# Altium PCB Booster_USER_IFC_ENC424J600.PcbDoc (part 1 of 2)
Units mm, origin at the board's own origin, x right, y up, seen from the top; angles counter-clockwise.
Board outline 78 x 45 mm, 2 copper layers (Top Layer, Bottom Layer), stack 1.571 mm thick; 90 components, 92 nets, 349 pads, 172 vias.
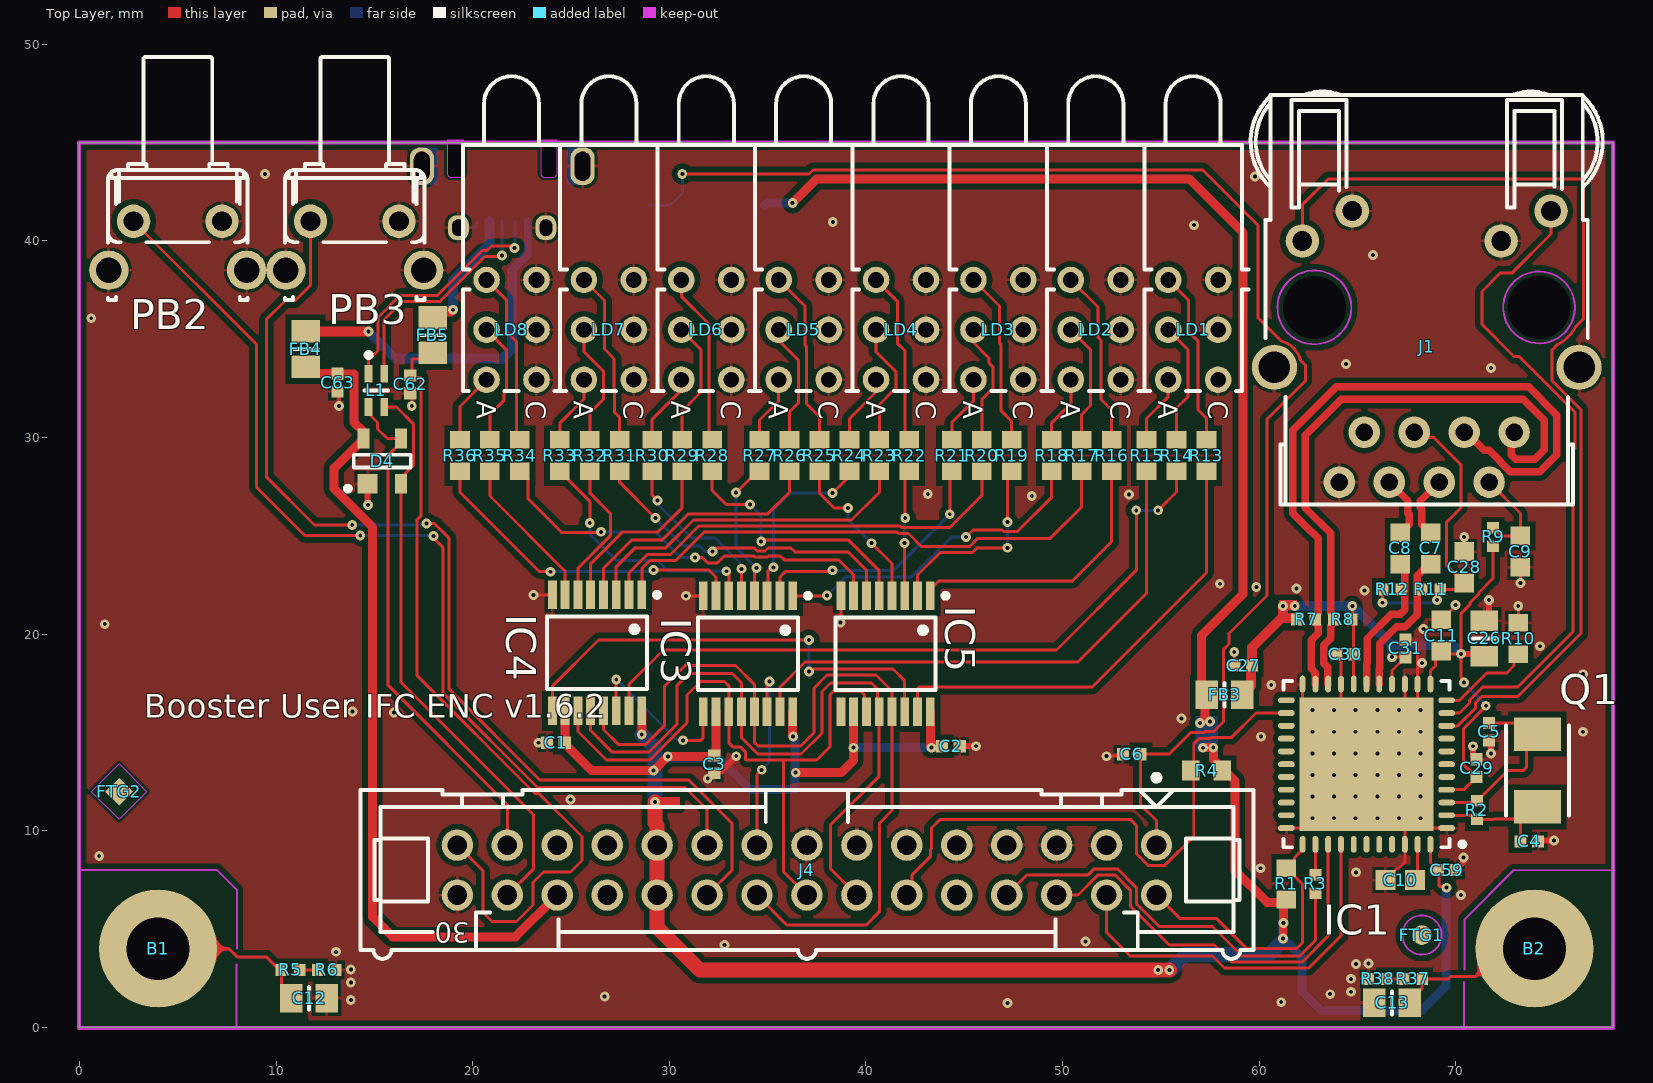
[diagram p0: Top Layer view]
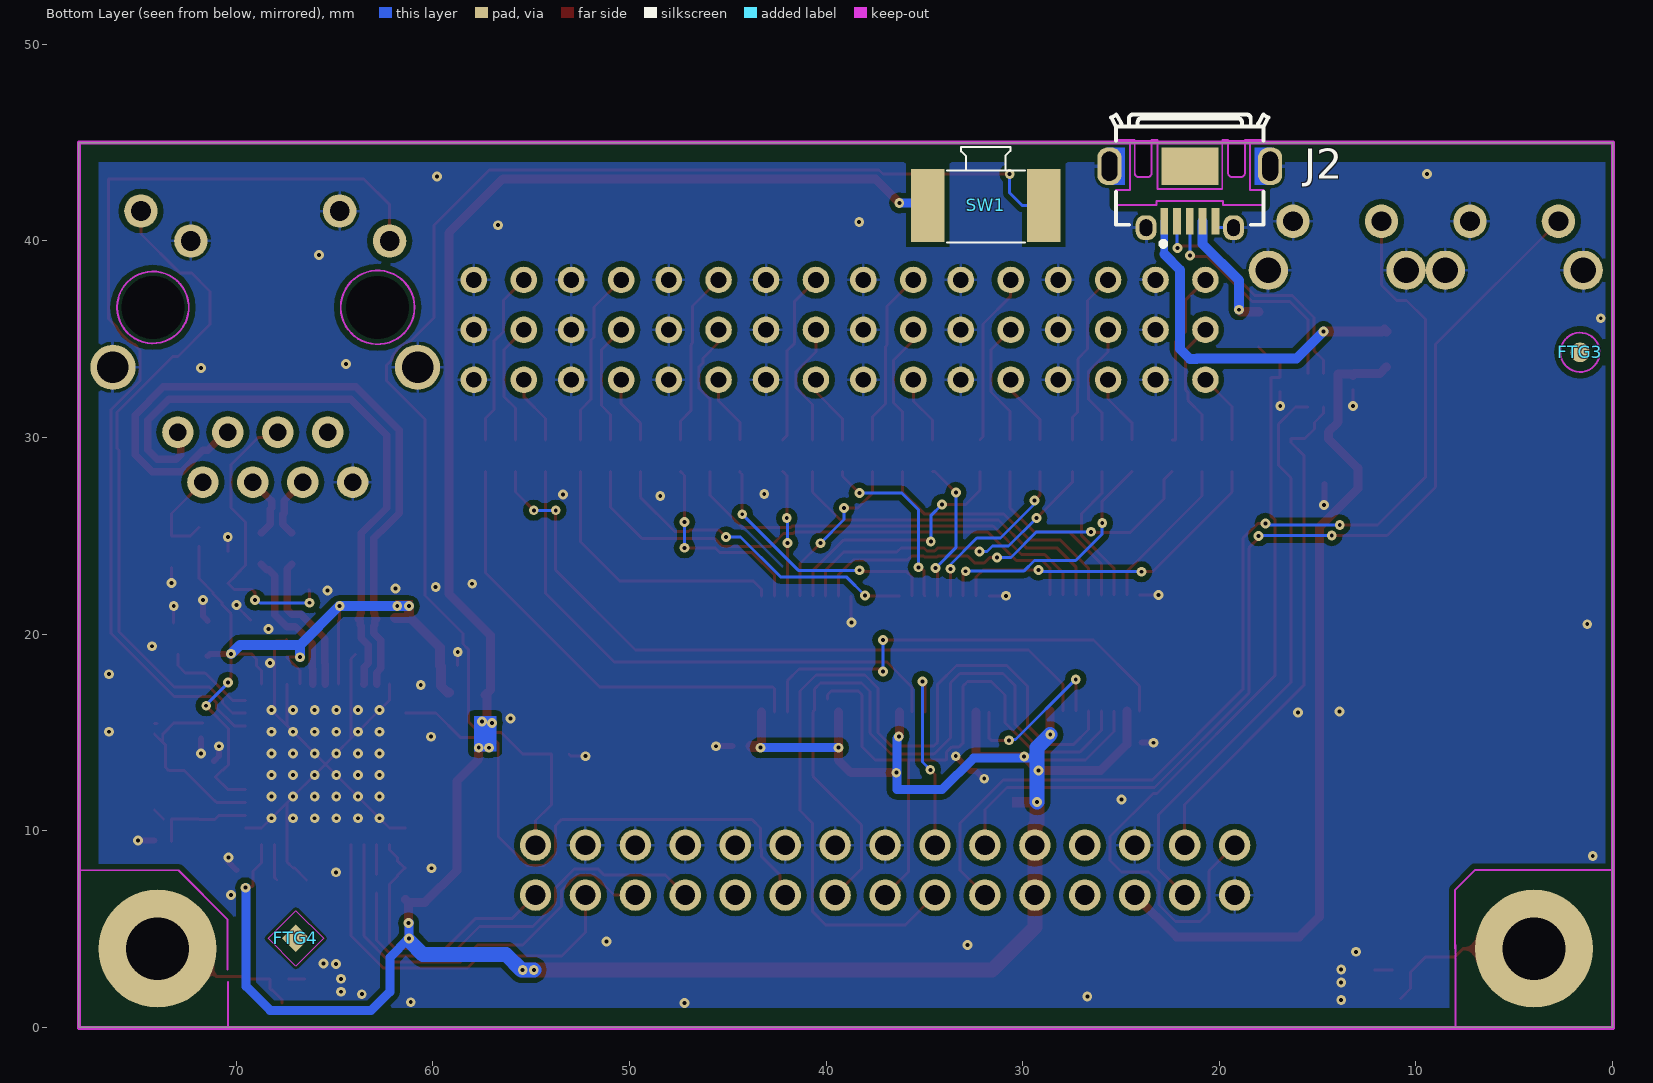
[diagram p1: Bottom Layer view, seen from below]
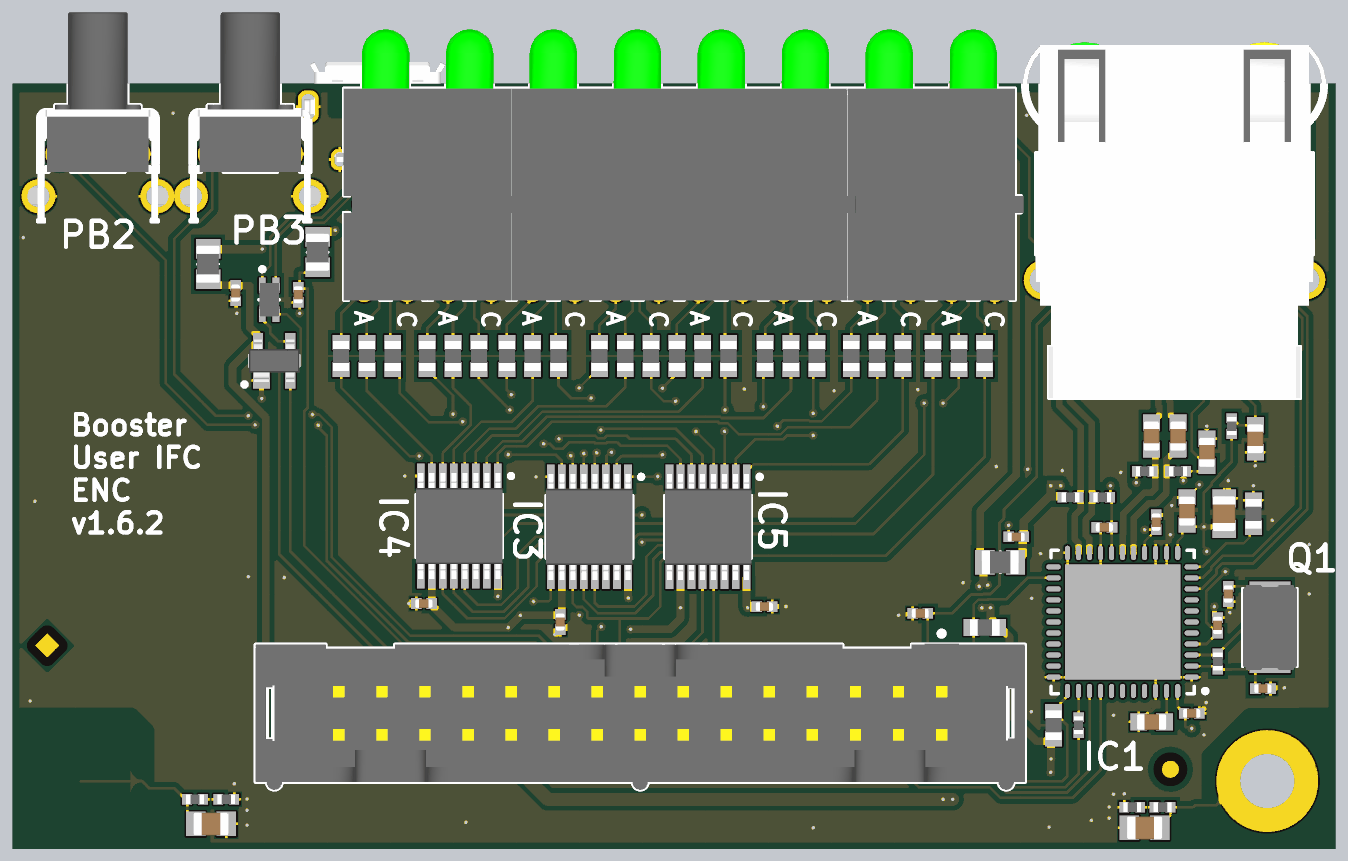
[diagram p2: 3D render of the assembled board from above, using the file's embedded part models]

## Layer stack, top to bottom
Top Solder: solder mask 0.0102, Solder Resist, Dk 3.5
Top Layer: signal copper 0.0356
Dielectric 1: dielectric 1.5, FR-4, Dk 4.8
Bottom Layer: signal copper 0.0356
Bottom Solder: solder mask 0.0102, Solder Resist, Dk 3.5

## Board outline
0,0 78,0 78,45 0,45

## Design rules (kind name [scope] priority, off if disabled: settings)
Clearance [All] p1: gap=0.152 ignorepadtopadclearanceinfootprint=FALSE except(0: Arc-Hole SMDPad-Hole THPad-Hole Via-Hole Fill-Hole Poly-Hole Region-Hole Text-Hole; 0.279: Arc-Poly Track-Poly SMDPad-Poly THPad-Poly Via-Poly Fill-Poly Poly-Poly)
DiffPairsRouting [All] p1: maxlimit=0.254 minlimit=0.254 mostfreqgap=0.254 toplayer_minwidth=0.254 toplayer_maxwidth=0.381 toplayer_prefwidth=0.381 bottomlayer_minwidth=0.254 bottomlayer_maxwidth=0.381 bottomlayer_prefwidth=0.381 maxuncoupledlength=12.7
HoleSize [All] p1: absolutevalues=TRUE maxlimit=5.08 minlimit=0.2 maxpercent=80.000 minpercent=20.000
MinimumSolderMaskSliver [All] p1: minsoldermaskwidth=0.025
PolygonConnect PolygonConnect_pad [IsPad] p1: connectstyle=Relief reliefconductorwidth=0.152 reliefentries=4 polygonreliefangle="90 Angle" airgapwidth=0.152
PolygonConnect [All] p2: connectstyle=Direct reliefconductorwidth=0.254 reliefentries=4 polygonreliefangle="45 Angle" airgapwidth=0.254
RoomDefinition Booster_USER_IFC_ENC424J600 [InComponentClass('Booster_USER_IFC_ENC424J600')] p1 off: confinementstyle=ConfineIn formatcopy=TRUE lockcomponents=FALSE outline 84.205,47.828 1.833,47.828 1.833,-0.432 84.205,-0.432
RoomDefinition U_LEDs [InComponentClass('U_LEDs')] p2 off: confinementstyle=ConfineIn formatcopy=TRUE lockcomponents=FALSE outline 81.557,48.796 10.818,48.796 10.818,-0.353 81.557,-0.353
RoomDefinition U_ETH_IFC [InComponentClass('U_ETH_IFC')] p3 off: confinementstyle=ConfineIn formatcopy=TRUE lockcomponents=FALSE outline 83.269,45.748 59,45.748 59,-0.861 83.269,-0.861
RoutingVias [All] p1: holewidth=0.711 width=0.5 viastyle="Through Hole" minholewidth=0.3 minwidth=0.5 maxholewidth=0.3 maxwidth=1.27 useviatemplates=TRUE viatemplateguid#1={FB9DD917-28AC-471E-A59E-34B30C6D48CE} viatemplatename#1=v50h20m0mx0
SilkToSilkClearance [All] p1: silktosilkclearance=0
SilkToSolderMaskClearance [IsPad] p1: minsilkscreentomaskgap=0 clearancetoexposedcopper=TRUE
SolderMaskExpansion [All] p1: expansion=0.102 istentingtop=FALSE
Width [All] p1: maxlimit=2.54 minlimit=0.152 preferedwidth=0.152
25 further rules are at their usual default settings.

## Classes and differential pairs
component class Booster_USER_IFC_ENC424J600: B1 B2 C6 C12 C13 C62 C63 D4 FB4 FB5 FTG1 FTG2 FTG3 FTG4 J2 J4 L1 PB2 PB3 R5 R6 R37 R38 SW1
component class U_ETH_IFC: C4 C5 C7 C8 C9 C10 C11 C26 C27 C28 C29 C30 C31 C59 FB3 IC1 J1 Q1 R1 R2 R3 R4 R7 R8 R9 R10 R11 R12
component class U_LEDs: C1 C2 C3 IC3 IC4 IC5 LD1 LD2 LD3 LD4 LD5 LD6 LD7 LD8 R13 R14 R15 R16 R17 R18 R19 R20 R21 R22 R23 R24 R25 R26 R27 R28 R29 R30 R31 R32 R33 R34 R35 R36
differential pair RJ45_TX: +RJ45_TX_P -RJ45_TX_N
differential pair RJ45_RX: +RJ45_RX_P -RJ45_RX_N
differential pair RJ45_RX_C: +RJ45_RX_C_P -RJ45_RX_C_N

## Components (designator, comment, footprint, x,y, rotation, side; value= is the part's Value field where it differs from the comment)
B1 "Plated Hole" MTG320_550#1 88.417,-1.981 r90 top
B2 "Plated Hole" MTG320_550#2 82.136,2.988 r90 top
C1 "100nF" CAPC1005X55N 24.235,14.478 r180 top
C2 "100nF" CAPC1005X55N 44.327,14.3 r0 top
C3 "100nF" CAPC1005X55N 32.287,13.386 r270 top
C4 "18pF" CAPC1005X55N 73.74,9.459 r180 top
C5 "18pF" CAPC1005X55N 71.7,15.037 r90 top
C6 "100nF" CAPC1005X55N 53.522,13.894 r0 top
C7 "6.8nF" CAPC1608X87N 68.736,24.358 r90 top
C8 "6.8nF" CAPC1608X87N 67.175,24.358 r90 top
C9 "10nF" CAPC1608X87N 73.29,24.2 r90 top
C10 "10uF" CAPC1608X80N 67.175,7.493 r180 top
C11 "6.8nF" CAPC1608X87N 69.263,19.931 r90 top
C12 "100pF" CAPC2012X88N 11.677,1.473 r0 top
C13 "100pF" CAPC2012X88N 66.763,1.24 r180 top
C26 "10uF" CAPC2012X135N 71.454,19.781 r90 top
C27 "100nF" CAPC1005X55N 59.186,18.405 r180 top
C28 "10nF" CAPC1608X87N 70.43,23.4 r270 top
C29 "100nF" CAPC1005X55N 71.064,13.187 r90 top
C30 "100nF" CAPC1005X55N 64.386,18.974 r180 top
C31 "100nF" CAPC1005X55N 67.441,19.279 r90 top
C59 "100nF" CAPC1005X55N 69.538,8 r0 top
C62 "100nF" CAPC1005X55N 16.824,32.7 r90 top
C63 "100nF" CAPC1005X55N 13.124,32.8 r90 top
D4 "PRTR5V0U2X" SOT190P230X110-4N 15.4,28.8 r90 top
FB3 "220R@100MHz" INDC2012X105N 58.242,16.912 r0 top
FB4 "220R@100MHz" INDC2012X105N 11.5,34.5 r90 top
FB5 "220R@100MHz" INDC2012X105N 17.962,35.204 r90 top
FTG1 "Use only in PCB" FIDUCIAL_TOP_C100-200 68.282,4.696 r90 top
FTG2 "Use only in PCB" FIDUCIAL_TOP_S100-200 2.01,11.989 r90 top
FTG3 "Use only in PCB" FIDUCIAL_TOP_C100-200 1.65,34.335 r90 bottom
FTG4 "Use only in PCB" FIDUCIAL_TOP_S100-200 66.971,4.529 r90 bottom
IC1 "ENC424J600-I/ML" QFN-ML44_M 65.463,13.387 r180 top
IC3 "SN74LV595APWT" SOP65P640X120-16N 34,19 r270 top
IC4 "SN74LV595APWT" SOP65P640X120-16N 26.325,19.05 r270 top
IC5 "SN74LV595APWT" SOP65P640X120-16N 41,19 r270 top
J1 "RJ45" TYCO_5-6605308-1 68.525,29 r180 top
J2 "Micro-USB AB 2.0" HIROSE_ZX62RD-AB-5P8 21.5,41 r0 bottom locked
J4 "" 3M_N2530-6002RB 37,8 r180 top locked
L1 "90R@100MHz" IND_MURATA_DLW21S 15.1,32.4 r270 top
LD1 "Red/Yellow/Green" LED_MENTOR_1882.2781 56.645,35.478 r270 top locked
LD2 "Red/Yellow/Green" LED_MENTOR_1882.2781 51.692,35.478 r270 top locked
LD3 "Red/Yellow/Green" LED_MENTOR_1882.2781 46.739,35.478 r270 top locked
LD4 "Red/Yellow/Green" LED_MENTOR_1882.2781 41.786,35.478 r270 top locked
LD5 "Red/Yellow/Green" LED_MENTOR_1882.2781 36.833,35.478 r270 top locked
LD6 "Red/Yellow/Green" LED_MENTOR_1882.2781 31.88,35.478 r270 top locked
LD7 "Red/Yellow/Green" LED_MENTOR_1882.2781 26.927,35.478 r270 top locked
LD8 "Red/Yellow/Green" LED_MENTOR_1882.2781 21.974,35.478 r270 top locked
PB2 "Push Button" PB_TYCO_1-1825027-1 5,41 r270 top
PB3 "Push Button" PB_TYCO_1-1825027-1 14,41 r270 top
Q1 "25MHz" XTAL_TXC_AA 74.154,13.063 r90 top
R1 "12k4" RESC1608X55N 61.388,7.3 r270 top
R2 "1M5" RESC1005X40N 71.082,11.052 r90 top
R3 "49R9" RESC1005X40N 62.863,7.3 r90 top
R4 "12k4" RESC1608X55N 57.325,13.063 r0 top
R5 "1M5" RESC1005X40N 10.732,2.921 r0 top
R6 "1M5" RESC1005X40N 12.577,2.921 r0 top
R7 "49R9" RESC1005X40N 62.385,20.752 r180 top
R8 "49R9" RESC1005X40N 64.256,20.752 r0 top
R9 "10" RESC1005X40N 71.898,24.943 r90 top
R10 "12k4" RESC1608X55N 73.181,19.774 r90 top
R11 "49R9" RESC1005X40N 68.736,22.275 r180 top
R12 "49R9" RESC1005X40N 66.763,22.275 r0 top
R13 "330" RESC1608X55N 57.323,29.082 r90 top
R14 "330" RESC1608X55N 55.799,29.082 r90 top
R15 "330" RESC1608X55N 54.275,29.082 r90 top
R16 "330" RESC1608X55N 52.497,29.082 r90 top
R17 "330" RESC1608X55N 50.973,29.082 r90 top
R18 "330" RESC1608X55N 49.449,29.082 r90 top
R19 "330" RESC1608X55N 47.417,29.082 r90 top
R20 "330" RESC1608X55N 45.893,29.082 r90 top
R21 "330" RESC1608X55N 44.369,29.082 r90 top
R22 "330" RESC1608X55N 42.21,29.082 r90 top
R23 "330" RESC1608X55N 40.686,29.082 r90 top
R24 "330" RESC1608X55N 39.162,29.082 r90 top
R25 "330" RESC1608X55N 37.638,29.082 r90 top
R26 "330" RESC1608X55N 36.114,29.082 r90 top
R27 "330" RESC1608X55N 34.59,29.082 r90 top
R28 "330" RESC1608X55N 32.177,29.082 r90 top
R29 "330" RESC1608X55N 30.653,29.082 r90 top
R30 "330" RESC1608X55N 29.129,29.082 r90 top
R31 "330" RESC1608X55N 27.478,29.082 r90 top
R32 "330" RESC1608X55N 25.954,29.082 r90 top
R33 "330" RESC1608X55N 24.43,29.082 r90 top
R34 "330" RESC1608X55N 22.398,29.082 r90 top
R35 "330" RESC1608X55N 20.874,29.082 r90 top
R36 "330" RESC1608X55N 19.35,29.082 r90 top
R37 "1M5" RESC1005X40N 67.822,2.464 r180 top
R38 "1M5" RESC1005X40N 66.031,2.464 r180 top
SW1 "KSS241G LFS" "KSS241G LFS" 31.881,41.808 r0 bottom locked

## Footprints (in the part's own frame and the unit in brackets; to place one, negate y for a bottom-side part, rotate by r counter-clockwise, add the part's x,y. Pads: shape width x height; smd on the part's side, far side on the other; paste and mask are expansions set on the pad)
3M_N2530-6002RB [mm] "30 Contacts - Straight .100\" x .100\" Low Profile Four-Wall Header"
  round 1.6 hole 1: 1(-17.78,-1.27) 2(-17.78,1.27) 3(-15.24,-1.27) 4(-15.24,1.27) 5(-12.7,-1.27) 6(-12.7,1.27) 7(-10.16,-1.27) 8(-10.16,1.27) 9(-7.62,-1.27) 10(-7.62,1.27) 11(-5.08,-1.27) 12(-5.08,1.27) 13(-2.54,-1.27) 14(-2.54,1.27) 15(0,-1.27) 16(0,1.27) 17(2.54,-1.27) 18(2.54,1.27) 19(5.08,-1.27) 20(5.08,1.27) 21(7.62,-1.27) 22(7.62,1.27) 23(10.16,-1.27) 24(10.16,1.27) 25(12.7,-1.27) 26(12.7,1.27) 27(15.24,-1.27) 28(15.24,1.27) 29(17.78,-1.27) 30(17.78,1.27)
  silkscreen extent -22.71,-4.85 22.71,4.52, body extent -22.71,-4.11 22.71,4.52, height 9.91
CAPC1005X55N [mm] "Chip Capacitor, Body 1.0x0.55mm, IPC Medium Density"
  rect 0.62x0.62 smd: 1(-0.45,0) 2(0.45,0)
  body extent -0.52,-0.27 0.53,0.28, height 0.55
CAPC1608X80N [mm] "Chip Capacitor, Body 1.6x0.8mm IPC Medium Density"
  rect 1x1 smd: 1(-0.75,0) 2(0.75,0)
  body extent -0.87,-0.47 0.88,0.48, height 0.8
CAPC1608X87N [mm] "Chip Capacitor, Body 1.6x0.8mm IPC Medium Density"
  rect 0.95x1 smd: 1(-0.8,0) 2(0.8,0)
  body extent -0.87,-0.47 0.88,0.48, height 0.87
CAPC2012X88N [mm] "Chip Capacitor, Body 2.0x1.25mm, IPC Medium Density"
  rect 1.15x1.45 smd: 1(-0.9,0) 2(0.9,0)
  silkscreen extent 0,-0.58 0,0.58, body extent -1.05,-0.67 1.05,0.68, height 0.9
CAPC2012X135N [mm] "Chip Capacitor, Body 2.0x1.25mm, IPC Medium Density"
  rect 1.05x1.4 smd: 1(-0.9,0) 2(0.9,0)
  silkscreen extent 0,-0.58 0,0.58, body extent -1.05,-0.67 1.05,0.68, height 1.25
FIDUCIAL_TOP_C100-200 [mm] "Round Fiducial Target, Top Layer, 1.0mm, Top Solder 2.0mm, Keepout =2.0mm"
  round 1 smd paste-0.51 mask+0.5: FTG2(0,0)
  Top Layer keep-out circle w0.1: c0,0 r1
FIDUCIAL_TOP_S100-200 [mm] "Square Fiducial Target, Top Layer, 1.0mm, Top Solder 2.0mm, Keepout =2.0mm"
  rect 1x1 smd rot 45 paste-0.51 mask+0.5: 1(0,0)
  Top Layer keep-out region: 1.414,0 0,-1.414 -1.414,0 0,1.414
HIROSE_ZX62RD-AB-5P8 [mm] "Right Angle, SMD Micro-USB Type AB - Reverse (Top mount), Shell Through Hole"
  rect 0.4x1.35 smd: 1(1.3,0) 2(0.65,0) 3(0,0) 4(-0.65,0) 5(-1.3,0)
  rrect80% 1.225x1.9 hole 0.8 slot 1.5 at 90 deg: 6(-4.088,-2.8) 6(4.088,-2.8)
  rrect80% 1.05x1.25 hole 0.65 slot 0.85 at 90 deg: 6(-2.225,0.325) 6(2.225,0.325)
  rect 2.9x1.9 smd: PastePad(0,-2.8)
  Top Layer region: 4.2,-3.75 4.2,-1.85 3.3,-1.85 3.3,-1.85 3.3,-3.75
  Top Layer region: -4.2,-1.85 -4.2,-3.75 -3.3,-3.75 -3.3,-3.75 -3.3,-1.85
  Top Layer keep-out lines w0.1: -3.75,-0.825 -1.7,-0.825 -1.7,-1.025 1.7,-1.025 1.7,-0.825 3.75,-0.825 3.75,-1.6 3.05,-1.6 3.05,-4 3.75,-4 3.75,-4.125 2.8,-4.125 2.8,-2.45 ccw(c2.6,-2.45) 2.6,-2.25 2.15,-2.25 ccw(c2.15,-2.45) 1.95,-2.45 1.95,-4.125 1.65,-4.125 1.65,-1.65 -1.65,-1.65 -1.65,-4.125 -1.95,-4.125 -1.95,-2.45 ccw(c-2.15,-2.45) -2.15,-2.25 -2.6,-2.25 ccw(c-2.6,-2.45) -2.8,-2.45 -2.8,-4.125 -3.75,-4.125 -3.75,-4 -3.05,-4 -3.05,-1.6 -3.75,-1.6 -3.75,-0.825
  Keep-Out Layer board cut-out: -2.8,-4.125 -2.8,-2.45 -2.785,-2.373 -2.741,-2.309 -2.676,-2.265 -2.6,-2.25 -2.6,-2.25 -2.15,-2.25 -2.073,-2.265 -2.009,-2.309 -1.965,-2.373 -1.95,-2.45 -1.95,-2.45 -1.95,-4.125
  Keep-Out Layer board cut-out: 1.95,-4.125 1.95,-2.45 1.965,-2.373 2.009,-2.309 2.074,-2.265 2.15,-2.25 2.15,-2.25 2.6,-2.25 2.677,-2.265 2.741,-2.309 2.785,-2.373 2.8,-2.45 2.8,-2.45 2.8,-4.125
  silkscreen extent -4,-5.42 4,1.27, body extent -4.32,-5.42 4.33,0.47, height 2.78
IND_MURATA_DLW21S [mm] "Common Mode Choke Coil, DLW21S Series - Body 2 x 1.2mm"
  rect 0.9x0.4 smd: 1(-0.85,-0.4) 2(0.85,-0.4) 3(0.85,0.4) 4(-0.85,0.4)
  silkscreen extent -1.92,-0.6 0,0.6, body extent -1,-0.6 1,0.6, height 1.4
INDC2012X105N [mm] "Chip Inductor, EIA 0805, Metric 2012, Body 2.0x1.25mm, IPC Medium Density"
  rect 1.15x1.45 smd: 1(-0.9,0) 2(0.9,0)
  silkscreen extent 0,-0.6 0,0.6, body extent -1.1,-0.7 1.1,0.7, height 1.1
"KSS241G LFS" [mm]
  rect 1.7x3.7 smd: 1(-2.95,0) 2(2.95,0)
  silkscreen extent -2,-2.98 1.97,1.88, body extent -3.6,-2.98 3.6,1.7, height 1.65
LED_MENTOR_1882.2781 [mm] "3x LED 3mm (Red+Yellow +Green) PCB Edge Mounting MENTOR 1882.2781"
  round 1.35 hole 0.8: 1(-2.54,1.27) 2(-2.54,-1.27) 3(0,1.27) 4(0,-1.27) 5(2.54,1.27) 6(2.54,-1.27)
  silkscreen extent -12.9,-2.47 3.1,2.83, body extent -12.88,-2.47 3.12,2.98, height 12
MTG320_550#1 [mm] "Plated Through Hole: Hole Dia.=3.2mm Pad Dia.=5.5mm"
  round 6 hole 3.2: 1(5.981,84.417)
MTG320_550#2 [mm] "Plated Through Hole: Hole Dia.=3.2mm Pad Dia.=5.5mm"
  round 6 hole 3.2: 1(1.012,8.136)
PB_TYCO_1-1825027-1 [mm] "Right Angle Micro Miniature Tactile Pushbutton Switche, Round Actuator Length = 5.74mm, FSMRAJ Serie"
  round 1.7 hole 1: 1(0,-2.25) 2(0,2.25)
  round 2 hole 1.3: 3(2.49,-3.505) 4(2.49,3.505)
  silkscreen extent -8.36,-3.56 4,3.56, body extent -8.36,-4.2 4,4.2, height 7.01
QFN-ML44_M [mm] "QFN, 44-Leads, Body 8x8mm, Pitch 0.65mm, Thermal Pad 6.8x6.8mm, IPC Low Density"
  oval 0.85x0.3 smd: 1(-4.075,3.25) 2(-4.075,2.6) 3(-4.075,1.95) 4(-4.075,1.3) 5(-4.075,0.65) 6(-4.075,0) 7(-4.075,-0.65) 8(-4.075,-1.3) 9(-4.075,-1.95) 10(-4.075,-2.6) 11(-4.075,-3.25) 23(4.075,-3.25) 24(4.075,-2.6) 25(4.075,-1.95) 26(4.075,-1.3) 27(4.075,-0.65) 28(4.075,0) 29(4.075,0.65) 30(4.075,1.3) 31(4.075,1.95) 32(4.075,2.6) 33(4.075,3.25)
  oval 0.3x0.85 smd: 12(-3.25,-4.075) 13(-2.6,-4.075) 14(-1.95,-4.075) 15(-1.3,-4.075) 16(-0.65,-4.075) 17(0,-4.075) 18(0.65,-4.075) 19(1.3,-4.075) 20(1.95,-4.075) 21(2.6,-4.075) 22(3.25,-4.075) 34(3.25,4.075) 35(2.6,4.075) 36(1.95,4.075) 37(1.3,4.075) 38(0.65,4.075) 39(0,4.075) 40(-0.65,4.075) 41(-1.3,4.075) 42(-1.95,4.075) 43(-2.6,4.075) 44(-3.25,4.075)
  rect 6.8x6.8 smd: 45(0,0)
  silkscreen extent -5,-4.23 4.23,4.23, body extent -4.07,-4.07 4.08,4.08, height 1
RESC1005X40N [mm] "Chip Resistor, EIA 0402, Metric 1005, Body 1.0x0.5mm, IPC Medium Density"
  rect 0.58x0.62 smd: 1(-0.47,0) 2(0.47,0)
  body extent -0.52,-0.27 0.53,0.28, height 0.4
RESC1608X55N [mm] "Chip Resistor, EIA 0603, Metric 1608, Body 1.6x0.8mm, IPC Medium Density"
  rect 0.9x1 smd: 1(-0.8,0) 2(0.8,0)
  body extent -0.87,-0.47 0.88,0.48, height 0.55
SOP65P640X120-16N [mm] "SOP, 0.65mm pitch; 16 pin, 4.40mm W X 5.00mm L X 1.20mm H body IPC Medium Density"
  rect 1.45x0.45 smd: 1(-2.95,2.275) 2(-2.95,1.625) 3(-2.95,0.975) 4(-2.95,0.325) 5(-2.95,-0.325) 6(-2.95,-0.975) 7(-2.95,-1.625) 8(-2.95,-2.275) 9(2.95,-2.275) 10(2.95,-1.625) 11(2.95,-0.975) 12(2.95,-0.325) 13(2.95,0.325) 14(2.95,0.975) 15(2.95,1.625) 16(2.95,2.275)
  silkscreen extent -3.07,-2.55 1.85,3.17, body extent -3.12,-2.55 3.12,2.55, height 1.2
SOT190P230X110-4N [mm] "SOT143, SOT, 1.90mm Pitch; 4 Pin, 1.30mm W X 2.90mm L X 1.10mm H body, IPC Medium Density"
  rect 1x1 smd: 1(-1.15,0.75)
  rect 1x0.6 smd: 2(-1.15,-0.95) 3(1.15,-0.95) 4(1.15,0.95)
  silkscreen extent -1.52,-1.45 0.33,1.87, body extent -1.25,-1.5 1.25,1.5, height 1.1
TYCO_5-6605308-1 [mm] "1 Port, Yellow/Green LEDs, RJ45 10/100Base-T Ethernet, Mag45 Connector Module With Integrated Magnetics"
  round 1.6 hole 0.9: 1(-4.445,-1.27) 2(-3.175,1.27) 3(-1.905,-1.27) 4(-0.635,1.27) 5(0.635,-1.27) 6(1.905,1.27) 7(3.175,-1.27) 8(4.445,1.27)
  round 2.3 hole 1.6: 9(-7.747,-4.572) 10(7.747,-4.572)
  round 1.7 hole 1: D1(-6.325,-12.522) D2(-3.785,-10.998) D3(6.325,-10.998) D4(3.785,-12.522)
  round 0.5 hole 3.2 unplated mask+1.35: M1(-5.715,-7.62) M2(5.715,-7.62)
  silkscreen extent -8.95,-18.59 8.95,2.41, body extent -8.95,-18.6 8.95,2.41, height 14.97
XTAL_TXC_AA [mm] "2 Pins, 3.2x5mm, SMD Glass Sealing Crystal, AA Series"
  rect 1.7x2.4 smd: 1(-1.85,0) 2(1.85,0)
  silkscreen extent -2.3,-1.6 2.3,1.6, body extent -2.5,-1.6 2.5,1.6, height 1.2

## Part data
B1 B2: library part PLATED_HOLE3.2_PAD5.5, "Single Terminal Socket", Author="CERN DEM JMW", Component Type="Standard (No BOM)", ComponentHeight=0mm, CreateDate=01.10.2012, Family="Plated Hole", HelpURL=Undefined, LatestRevisionDate=01.10.2012, Mounted=No, PackageDescription="Plated Through Hole: Hole Dia.=3.2mm Pad Dia.=5.5mm", Part Description="Plated Through Hole: Hole Dia.=3.2mm Pad Dia.=5.5mm", Part Number=PLATED_HOLE3.2_PAD5.5, Pin Count=1, Sense=No, SMD=No, Socket=No, Status=None
C1 C2 C3 C6 C27 C29 C30 C31 C59 C62 C63: library part CC0402_100NF_16V_10%_X7R, "Non-polarised capacitor", Case=0402, Manufacturer=GENERIC, Manufacturer1 ComponentHeight=0.55mm, Manufacturer1 Example=MURATA, Manufacturer1 Part Number=GRM155R71C104KA88D, Tolerance=±10%, Voltage=16V, Author="CERN DEM JLC", Component Type=Standard, CreateDate=05.12.2013, HelpURL=\\cern.ch\dfs\Applications\Altium\Datasheets\CC0402_X7R_MURATA_GRM.pdf, LatestRevisionDate=03.12.2007, Manufacturer Part Number=CC0402_100NF_16V_10%_X7R, Mounted=Yes, Part Description="SMD Multilayer Chip Ceramic Capacitor", Part Number=CC0402_100NF_16V_10%_X7R, Pin Count=2, Sense=No, SMD=Yes, Socket=No, Status="Not Recommended", TC=X7R
C4 C5: library part CC0402_18PF_50V_5%_C0G, "Non-polarised capacitor", Case=0402, Manufacturer=GENERIC, Manufacturer1 ComponentHeight=0.55mm, Manufacturer1 Example=KEMET, Manufacturer1 Part Number=C0402C180J5GACTU, Tolerance=±5%, Voltage=50V, Author="CERN DEM JLC", Component Type=Standard, CreateDate=04.10.2016, HelpURL="\\cern.ch\dfs\Applications\Altium\Datasheets\CC0402_C0G_KEMET_(Commercial Grade).pdf", LatestRevisionDate=04.10.2016, Manufacturer Part Number=CC0402_18PF_50V_5%_C0G, Mounted=Yes, Part Description="SMD Multilayer Chip Ceramic Capacitor", Part Number=CC0402_18PF_50V_5%_C0G, Pin Count=2, Sense=No, SMD=Yes, Socket=No, Status=Preferred, TC=C0G/NP0
C7 C8 C11: library part CC0603_6.8NF_25V_1%_C0G, "Non-polarised capacitor", Case=0603, Manufacturer=GENERIC, Manufacturer1 ComponentHeight=0.87mm, Manufacturer1 Example=KEMET, Manufacturer1 Part Number=C0603C682F3GACTU, Tolerance=±1%, Voltage=25V, Author="CERN DEM JLC", Component Type=Standard, CreateDate=23/05/2018, HelpURL="\\cern.ch\dfs\Applications\Altium\Datasheets\CC0603_C0G_KEMET_(Commercial Grade).pdf", LatestRevisionDate=23/05/2018, Manufacturer Part Number=CC0603_6.8NF_25V_1%_C0G, Mounted=Yes, Part Description="SMD Multilayer Chip Ceramic Capacitor", Part Number=CC0603_6.8NF_25V_1%_C0G, Pin Count=2, Sense=No, SMD=Yes, Socket=No, Status=None, TC=C0G/NP0
C9 C28: library part CC0603_10NF_50V_5%_C0G, "Non-polarised capacitor", Case=0603, Manufacturer=GENERIC, Manufacturer1 ComponentHeight=0.9mm, Manufacturer1 Example=TDK, Manufacturer1 Part Number=C1608C0G1H103J080AA, Tolerance=±5%, Voltage=50V, Author="CERN DEM JLC", Component Type=Standard, CreateDate=10.12.2014, HelpURL=\\cern.ch\dfs\Applications\Altium\Datasheets\CC0603_C0G_TDK_C.pdf, LatestRevisionDate=10.12.2014, Manufacturer Part Number=CC0603_10NF_50V_5%_C0G, Mounted=Yes, Part Description="SMD Multilayer Chip Ceramic Capacitor", Part Number=CC0603_10NF_50V_5%_C0G, Pin Count=2, Sense=No, SMD=Yes, Socket=No, Status=Preferred, TC=C0G/NP0
C10: library part CC0603_10UF_16V_20%_X5R, "Non-polarised capacitor", Case=0603, Manufacturer=GENERIC, Manufacturer1 ComponentHeight=0.8mm, Manufacturer1 Example=MURATA, Manufacturer1 Part Number=GRM188R61C106MA73D, Tolerance=±20%, Voltage=16V, Author="CERN DEM MR", Component Type=Standard, CreateDate=02/03/2016, HelpURL=\\cern.ch\dfs\Applications\Altium\Datasheets\CC0603_X5R_MURATA_GRM.pdf, LatestRevisionDate=02/03/2016, Manufacturer Part Number=CC0603_10UF_16V_20%_X5R, Mounted=Yes, Part Description="SMD Multilayer Chip Ceramic Capacitor", Part Number=CC0603_10UF_16V_20%_X5R, Pin Count=2, Sense=No, SMD=Yes, Socket=No, Status=None, TC=X5R
C12 C13: library part CC0805_100PF_200V_5%_C0G, "Non-polarised capacitor", Case=0805, Manufacturer=GENERIC, Manufacturer1 ComponentHeight=0.88mm, Manufacturer1 Example=KEMET, Manufacturer1 Part Number=C0805C101J2GACTU, Tolerance=±5%, Voltage=200V, Author="CERN DEM JLC", Component Type=Standard, CreateDate=23.09.2014, HelpURL="\\cern.ch\dfs\Applications\Altium\Datasheets\CC0805_C0G_KEMET_(Commercial Grade).pdf", LatestRevisionDate=23.09.2014, Manufacturer Part Number=CC0805_100PF_200V_5%_C0G, Mounted=Yes, Part Description="SMD Multilayer Chip Ceramic Capacitor", Part Number=CC0805_100PF_200V_5%_C0G, Pin Count=2, Sense=No, SMD=Yes, Socket=No, Status=Preferred, TC=C0G/NP0
C26: library part CC0805_10UF_10V_10%_X7R, "Non-polarised capacitor", Case=0805, Manufacturer=GENERIC, Manufacturer1 ComponentHeight=1.35mm, Manufacturer1 Example=MURATA, Manufacturer1 Part Number=GRM21BR71A106KE51L, Tolerance=±10%, Voltage=10V, Author="CERN DEM JLC", Component Type=Standard, CreateDate=2012-04-30, HelpURL=\\cern.ch\dfs\Applications\Altium\Datasheets\CC0805_X7R_MURATA.pdf, LatestRevisionDate=2012-04-30, Manufacturer Part Number=CC0805_10UF_10V_10%_X7R, Mounted=Yes, Part Description="SMD Multilayer Chip Ceramic Capacitor", Part Number=CC0805_10UF_10V_10%_X7R, Pin Count=2, SMD=Yes, Socket=No, Status=Preferred, Table="Capacitors SMD", TC=X7R
D4: "Ultra Low Capacitance Double Rail-to-Rail ESD Protection Diode", Case=SOT143B, Manufacturer="NXP SEMICONDUCTORS", Voltage=5.5V, Author="CERN DEM JLC", Bonding=No, ComponentHeight=1.1mm, Component Type=Standard, CreateDate=22.03.2011, Device=PRTR5V0U2X, HelpURL=\\cern.ch\dfs\Applications\Altium\Datasheets\PRTR5V0U2X.pdf, LatestRevisionDate=22.03.2011, Manufacturer Part Number=PRTR5V0U2X, Mounted=Yes, PackageDescription="SOT143B, SOT, 1.90mm Pitch; 4 Pin, 1.30mm W X 2.90mm L X 1.10mm H body, IPC Medium Density", Part Description="Ultra Low Capacitance (1pF) Double Rail-to-Rail ESD Protection Diode (8kV)", Part Number=PRTR5V0U2X, Pin Count=4, PressFit=No, Sense=No, SMD=Yes, Socket=No
FB3 FB4 FB5: library part IND0805_MURATA_BLM21PG221SN1D, "Inductor", Case=0805, Manufacturer=MURATA, Manufacturer Part Number=BLM21PG221SN1D, Power=2A, Resistance=0.05R, Tolerance=±25%, Author="CERN DEM JLC", ComponentHeight=1.05mm, Component Type=Standard, CreateDate=2010-01-25, HelpURL=\\cern.ch\dfs\Applications\Altium\Datasheets\IND0402_MURATA_BLM21P.pdf, LatestRevisionDate=2010-01-25, Mounted=Yes, Part Description="SMD EMIFIL Suppression Chip Ferrite Bead", Part Number=IND0805_MURATA_BLM21PG221SN1D, Pin Count=2, SMD=Yes, Socket=No, Status=None, Table="Inductors SMD"
FTG1 FTG3: library part FIDUCIAL_TARGET_C100-200, "Fiducial Target", Author="CERN DEM JLC", Component Type="Standard (No BOM)", ComponentHeight=0mm, CreateDate=09.02.2010, Family=Fiducial, HelpURL=Undefined, LatestRevisionDate=04.04.2012, Mounted=No, PackageDescription="Round Fiducial Target, Top Layer, 1.0mm, Top Solder 2.0mm, Keepout =2.0mm", Part Description="Round Fiducial Target, Top Layer, 1.0mm, Top Solder 2.0mm, Keepout =2.0mm", Part Number=FIDUCIAL_TARGET_C100-200, Pin Count=1, Sense=No, SMD=Yes, Socket=No, Status=None
FTG2 FTG4: library part FIDUCIAL_TARGET_S100-200, "Fiducial Target", Author="CERN DEM JLC", Component Type="Standard (No BOM)", ComponentHeight=0mm, CreateDate=09.02.2010, Family=Fiducial, HelpURL=Undefined, LatestRevisionDate=04.04.2012, Mounted=No, PackageDescription="Square Fiducial Target, Top Layer, 1.0mm, Top Solder 2.0mm, Keepout =2.0mm", Part Description="Square Fiducial Target, Top Layer, 1.0mm, Top Solder 2.0mm, Keepout =2.0mm", Part Number=FIDUCIAL_TARGET_S100-200, Pin Count=1, Sense=No, SMD=Yes, Socket=No, Status=None
IC1: library part CMP-0186-00117-2, "Stand-Alone 10/100 Ethernet Controller with SPI or Parallel Interface, 44-Pin QFN, Industrial Temperature", Code_IPC=QFN65P800X800-44V2, Code_JEDEC=MO-220, ComponentLink1Description="Manufacturer URL", ComponentLink1URL=http://www.microchip.com/, ComponentLink2Description=Datasheet, ComponentLink2URL=http://ww1.microchip.com/downloads/en/DeviceDoc/39935c.pdf, ComponentLink3Description="Package Specification", ComponentLink3URL=http://www.microchip.com/stellent/groups/techpub_sg/documents/packagingspec/en012702.pdf, DatasheetVersion="revC, Jan-2010", Manufacturer Part Number=ENC424J600-I/ML, PackageDescription="44-Lead Plastic Quad Flat, No Lead Package (ML) - 8x8 mm Body [QFN]", PackageReference=QFN-ML44, PackageVersion="revBB, Aug-2009", RevisionNote="URLs added. DatasheetVersion updated. Sch updated."
IC3 IC4 IC5: "8-Bit Shift Register With 3-State Output Register", Case=TSSOP16, Manufacturer="TEXAS INSTRUMENTS", Author="CERN DEM JLC", Bonding=No, ComponentHeight=1.2mm, Component Type=Standard, CreateDate=10.05.2012, Device=SN74LV595APWT, HelpURL=\\cern.ch\dfs\Applications\Altium\Datasheets\SN74LV595APWT.pdf, LatestRevisionDate=10.05.2012, Manufacturer Part Number=SN74LV595APWT, Mounted=Yes, PackageDescription="SOP, 0.65mm pitch; 16 pin, 4.40mm W X 5.00mm L X 1.20mm H body IPC Medium Density", Part Description="8-Bit Shift Register With 3-State Output Register", Part Number=SN74LV595APWT, Pin Count=16, PressFit=No, Sense=No, SMD=Yes, Socket=No
J1: library part TYCO_5-6605308-1, "1 Port, Yellow/Green LEDs, RJ45 10/100Base-T Ethernet, Mag45 Connector Module With Integrated Magnetics", Manufacturer="TYCO ELECTRONICS", Manufacturer Part Number=5-6605308-1, Author="CERN DEM JLC", ComponentHeight=15.24mm, Component Type=Standard, CreateDate=23.08.2012, Family=RJ45, HelpURL=\\cern.ch\dfs\Applications\Altium\Datasheets\TYCO_5-6605308-1.pdf, LatestRevisionDate=23.08.2012, Mounted=Yes, Part Description="1 Port, Yellow/Green LEDs, RJ45 10/100Base-T Ethernet, Mag45 Connector Module With Integrated Magnetics", Part Number=TYCO_5-6605308-1, Pin Count=14, PressFit=No, Sense=No, SMD=No, Socket=No, Status=None
J2: library part HIROSE_ZX62RD-AB-5P8, "5 Pin + 1 Shield USB Receptacle", Manufacturer="HIROSE (HRS)", Manufacturer Part Number=ZX62RD-AB-5P8, Author="CERN DEM JLC", ComponentHeight=2.35mm, ComponentLink1Description=Package-Drawing, ComponentLink1URL=\\cern.ch\dfs\Applications\Altium\Datasheets\HIROSE_ZX62RD-AB-5P8_Package-Drawing.pdf, Component Type=Standard, CreateDate=29.10.2014, Family="Micro-USB AB 2.0", HelpURL=\\cern.ch\dfs\Applications\Altium\Datasheets\HIROSE_ZX62RD-AB-5P8.pdf, LatestRevisionDate=29.10.2014, Mounted=Yes, Part Description="Micro-USB 2.0 Right Angle, SMD Type AB - Reverse (Top mount), Shell Through Hole", Part Number=HIROSE_ZX62RD-AB-5P8, Pin Count=7, PressFit=No, Sense=No, SMD=Yes, Socket=No, Status=None
J4: library part 3M_N2530-6002RB, "Connector 30 Male", Manufacturer=3M, Manufacturer Part Number=N2530-6002RB, Author="CERN DEM JLC", ComponentHeight=10.03mm, Component Type=Standard, CreateDate=11.02.2009, Family="Header 30", HelpURL=\\cern.ch\dfs\Applications\Altium\Datasheets\3M_N2530-6002RB.pdf, LatestRevisionDate=11.08.2009, Mounted=Yes, Part Description="30 Contacts - Straight .100'' x .100'' Low Profile Four-Wall Header, 2500 Series", Part Number=3M_N2530-6002RB, Pin Count=30, PressFit=No, Sense=No, SMD=No, Socket=No, Status=None
L1: library part IND_MURATA_DLW21SN900SQ2L, "Inductor Common Mode", Case=0805, Manufacturer=MURATA, Manufacturer Part Number=DLW21SN900SQ2L, Power=330mA, Resistance=0.35R, Tolerance=±25%, Author="CERN DEM JLC", ComponentHeight=1.4mm, Component Type=Standard, CreateDate=01.07.2014, HelpURL=\\cern.ch\dfs\Applications\Altium\Datasheets\IND_MURATA_DLW21S.pdf, LatestRevisionDate=01.07.2014, Mounted=Yes, Part Description="Wire Wound Common Mode Choke Coil (DLW21S Series)", Part Number=IND_MURATA_DLW21SN900SQ2L, Pin Count=4, Sense=No, SMD=Yes, Socket=No, Status=None
LD1 LD2 LD3 LD4 LD5 LD6 LD7 LD8: library part LED_MENTOR_1882.2781, "LED x3 G-1C2A-BOT_Y-3C4A_R-5C6A-TOP", Manufacturer=MENTOR, Manufacturer Part Number=1882.2781, Author="CERN DEM JLC", Bonding=No, Color=Red/Yellow/Green, ComponentHeight=12mm, Component Type=Standard, CreateDate=03.02.2009, HelpURL=\\cern.ch\dfs\Applications\Altium\Datasheets\LED_MENTOR_1882.2781.pdf, LatestRevisionDate=17.03.2010, Mounted=Yes, PackageDescription="3x LED 3mm (Red+Yellow +Green) PCB Edge Mounting MENTOR 1882.2781", Part Description="Triple 3mm LEDs, Red Top, Yellow Mid, Green Bot, PCB Edge Mounting", Part Number=LED_MENTOR_1882.2781, Pin Count=6, PressFit=No, Sense=No, SMD=No, Socket=No
PB2 PB3: library part PB_TYCO_1-1825027-1, "Push-Button Switch SPDT", Manufacturer="TYCO ELECTRONICS", Manufacturer Part Number=1-1825027-1, Author="CERN DEM JLC", ComponentHeight=7.01mm, Component Type=Standard, CreateDate=17.04.2013, Family="Push Button", HelpURL=\\cern.ch\dfs\Applications\Altium\Datasheets\PB_TYCO_1-1825027-1.pdf, LatestRevisionDate=28.10.2013, Mounted=Yes, PackageDescription="Right Angle Micro Miniature Tactile Pushbutton Switch, Round Actuator Length = 5.74mm, FSMRAJ Serie", Part Description="Right Angle Micro Miniature Tactile Pushbutton Switch, Round Actuator Length = 5.74mm, FSMRAJ Serie", Part Number=PB_TYCO_1-1825027-1, Pin Count=4, PressFit=No, Sense=No, SMD=No, Socket=No, Status=None
Q1: library part XTAL_25MHZ_TXC_AA-25.000MALE-T, "Quartz Crystal", Manufacturer="TXC CORPORATION", Manufacturer Part Number=AA-25.000MALE-T, Author=GK, Bonding=No, Component Type=Standard, ComponentHeight=1.2mm, CreateDate=28.08.2018, HelpURL=\\cern.ch\dfs\Applications\Altium\Datasheets\XTAL_TXC_AA.pdf, LatestRevisionDate=28.08.2018, Mounted=Yes, PackageDescription="SMD Glass Seam Sealing Crystal, 2 Pins, 3.20mm L X 5.00mm W, AA Serie", Part Description="Tolerance: ± 30ppm, Stability: ±50ppm, -40°C to +85°C, 8pF, SMD Glass Sealing Crystal, AA Series", Part Number=XTAL_25MHZ_TXC_AA-25.000MALE-T, Pin Count=2, PressFit=No, Sense=No, SMD=Yes, Socket=No
R1 R4 R10: library part R0603_12K4_0.1%_0.063W_10PPM, "Resistor - 0.1%", Case=0603, Manufacturer=GENERIC, Manufacturer1 ComponentHeight=0.5mm, Manufacturer1 Example="TYCO HOLSWORTHY", Manufacturer1 Part Number=RN73C1J12K4BTDF, Power=0.063W, Tolerance=±0.1%, Author="CERN DEM JLC", Component Type=Standard, CreateDate=03.12.2007, HelpURL=\\cern.ch\dfs\Applications\Altium\Datasheets\R0603_Tyco_RN73.pdf, LatestRevisionDate=13.03.2008, Manufacturer Part Number=R0603_12K4_0.1%_0.063W_10PPM, Mounted=Yes, Part Description="Thin Film Chip Resistor", Part Number=R0603_12K4_0.1%_0.063W_10PPM, Pin Count=2, Sense=No, SMD=Yes, Socket=No, Status="Not recommended", TC=±10ppm
R2 R5 R6 R37 R38: library part R0402_1M5_1%_0.0625W_100PPM, "Resistor - 1%", Case=0402, Manufacturer=GENERIC, Manufacturer1 ComponentHeight=0.4mm, Manufacturer1 Example="YAGEO PHYCOMP", Manufacturer1 Part Number=232270671505L, Power=0.0625W, Tolerance=±1%, Author="CERN DEM JLC", Component Type=Standard, CreateDate=03/12/2007, HelpURL=\\cern.ch\dfs\Applications\Altium\Datasheets\R0402_Phycomp_RC0402.pdf, LatestRevisionDate=17/10/2012, Manufacturer Part Number=R0402_1M5_1%_0.0625W_100PPM, Mounted=Yes, Part Description="General Purpose Thick Film Chip Resistor", Part Number=R0402_1M5_1%_0.0625W_100PPM, Pin Count=2, PressFit=No, Sense=No, SMD=Yes, Socket=No, Status="Not Recommended", TC=±100ppm/°C
R3 R7 R8 R11 R12: library part R0402_49R9_1%_0.0625W_100PPM, "Resistor - 1%", Case=0402, Manufacturer=GENERIC, Manufacturer1 ComponentHeight=0.4mm, Manufacturer1 Example="YAGEO PHYCOMP", Manufacturer1 Part Number="232270674999L or RC0402FR-0749R9L", Power=0.0625W, Tolerance=±1%, Author="CERN DEM JLC", Component Type=Standard, CreateDate=2012-10-24, HelpURL=\\cern.ch\dfs\Applications\Altium\Datasheets\R0402_Phycomp_RC0402.pdf, LatestRevisionDate=2012-10-24, Manufacturer Part Number=R0402_49R9_1%_0.0625W_100PPM, Mounted=Yes, Part Description="General Purpose Thick Film Chip Resistor", Part Number=R0402_49R9_1%_0.0625W_100PPM, Pin Count=2, SMD=Yes, Socket=No, Status="Not recommended", Table="Resistors SMD", TC=±100ppm/°C
R9: library part R0402_10R_1%_0.0625W_200PPM, "Resistor - 1%", Case=0402, Manufacturer=GENERIC, Manufacturer1 ComponentHeight=0.4mm, Manufacturer1 Example="YAGEO PHYCOMP", Manufacturer1 Part Number=232270671009L, Power=0.0625W, Tolerance=±1%, Author="CERN DEM JLC", Component Type=Standard, CreateDate=24.06.2009, HelpURL=\\cern.ch\dfs\Applications\Altium\Datasheets\R0402_Phycomp_RC0402.pdf, LatestRevisionDate=17.10.2012, Manufacturer Part Number=R0402_10R_1%_0.0625W_200PPM, Mounted=Yes, Part Description="General Purpose Thick Film Chip Resistor", Part Number=R0402_10R_1%_0.0625W_200PPM, Pin Count=2, Sense=No, SMD=Yes, Socket=No, Status="Not recommended", TC=±200ppm/°C
R13 R14 R15 R16 R17 R18 R19 R20 R21 R22 R23 R24 R25 R26 R27 R28 R29 R30 R31 R32 R33 R34 R35 R36: library part R0603_330R_1%_0.1W_100PPM, "Resistor - 1%", Case=0603, Manufacturer=GENERIC, Manufacturer1 ComponentHeight=0.55mm, Manufacturer1 Example="NIC COMPONENT", Manufacturer1 Part Number=NRC06F3300TRF, Power=0.1W, Tolerance=±1%, Author="CERN DEM JLC", Component Type=Standard, CreateDate=2007-12-03, HelpURL=\\cern.ch\dfs\Applications\Altium\Datasheets\R0603_NIC_NRC.pdf, LatestRevisionDate=2008-03-13, Manufacturer Part Number=R0603_330R_1%_0.1W_100PPM, Mounted=Yes, Part Description="General Purpose Thick Film Chip Resistor", Part Number=R0603_330R_1%_0.1W_100PPM, Pin Count=2, SMD=Yes, Socket=No, Status=Preferred, Table="Resistors SMD", TC=±100ppm/°C
SW1: library part SW-TACT_SMD_RA_mini, "Push button", Supplier Part Number 1=1437640, Manufacturer Part Number="KSS241G LFS", Supplier 1=Farnell

## Via types
v1: diameter 0.5, hole 0.2, Top Layer to Bottom Layer, tented both sides, 136 vias
v2: diameter 0.5, hole 0.2, Top Layer to Bottom Layer, 36 vias

## Nets (pads, with @x,y where several pads share a name; then routed paths per layer and width w, separated by ;. In a path a pad name is that pad's centre, name@x,y a point inside that pad or via, vN(x,y) a via of type N, cw(c..) or ccw(c..) an arc to the next point about the centre after c; other vN are vias at no path point)
BOOT: C6.2 J4.1 SW1.1 | length 71.4
  Top Layer w0.152: v1(30.662,43.409) 37.102,43.409 37.305,43.612 57.128,43.612 59.948,40.792 59.948,36.093 61.139,34.903 cw(c60.778,33.572) 62.109,33.933 62.35,33.691 62.35,32.882 60.405,30.937 60.405,21.971 58.465,20.031 58.465,19.503 58.197,19.236 58.197,15.563 57.674,15.04 57.25,15.04 57.218,15.009 56.535,15.009 55.42,13.894 C6.2 53.972,11.328 54.78,10.52 J4.1
  Bottom Layer w0.152: SW1.1 30.027,41.808 30.662,42.443 v1(30.662,43.409)
GND: C1.2 C2.2 C3.2 C4.1 C5.1 C6.1 C9.1 C10.2 C11.2 C12.2 C13.2 C26.2 C27.2 C28.1 C29.2 C30.2 C31.2 C59.2 C62.1 C63.1 D4.1 IC1.1 IC1.13 IC1.14 IC1.19 IC1.22 IC1.33 IC1.42 IC1.45 IC3.8 IC4.8 IC5.8 J1.8 J1.9 J1.10 J1.D2 J1.D4 J2.5 J2.6 J4.3 J4.5 J4.7 J4.9 J4.11 J4.13 J4.15 J4.25 J4.30 LD1.1 LD1.3 LD1.5 LD2.1 LD2.3 LD2.5 LD3.1 LD3.3 LD3.5 LD4.1 LD4.3 LD4.5 LD5.1 LD5.3 LD5.5 LD6.1 LD6.3 LD6.5 LD7.1 LD7.3 LD7.5 LD8.1 LD8.3 LD8.5 PB2.2 PB2.3 PB2.4 PB3.2 PB3.3 PB3.4 R6.2 R10.2 R38.2 | length 55.3
  Top Layer w0.152: v1(13.2,31.6) C63.1@13.2,32.45 ; v1(16.9,31.6) C62.1@16.9,32.35 ; v1(23.1,22) IC4.8 ; v1(30.85,21.95) IC3.8 ; v1(38.7,20.6) 38.725,20.625 IC5.8 ; v1(52.24,13.792) 52.97,13.792 C6.1 ; C27.2 v1(58.736,19.098) ; IC1.33 62.213,10.137 v2(62.713,10.637) IC1.45 ; IC1.22 62.213,16.637 v2(62.713,16.137) v2(63.813,15.037) IC1.45@64.163,14.687 ; C30.2 64.163,18.747 IC1.19 IC1.45@64.163,14.687 ; C10.2 67.032,8.1 67.113,8.1 67.413,8.4 IC1.42 IC1.45@67.413,11.437 ; IC1.14 IC1.45@67.413,15.337 ; C31.2 67.517,19.652 67.973,19.652 68.063,19.563 68.063,15.987 IC1.45@67.413,15.337 ; C11.2 69.288,20.731 69.988,21.431 v1(69.988,21.488) ; IC1.1 68.713,10.137 v2(68.213,10.637) IC1.45@67.413,11.437 ; C28.1 v1(70.43,24.943) ; R10.2 v1(73.181,21.425) ; v1(73.29,22.6) C9.1 ; IC1.45@64.163,14.687 v2(64.913,13.937) IC1.45 ; IC1.45 IC1.45@67.413,15.337 ; IC1.45 v2(66.013,12.837) v2(67.113,11.737) IC1.45@67.413,11.437
  Top Layer w0.305: D4.1 14.65,26.585 v1(14.667,26.568) ; v1(23.346,14.478) C1.2 C1.2@23.962,14.478 ; v1(31.957,12.649) 31.977,12.649 32.363,13.036 32.648,13.036 v1(33.405,13.792) ; C2.2@44.753,14.3 C2.2 v1(45.597,14.3) ; J4.3 J4.3@52.429,9.459 ; C59.2 70.388,8.4 v1(70.388,8.636) ; v1(70.877,14.3) 70.877,13.8 C29.2@71.14,13.537 ; C26.2 71.7,20.927 v1(71.7,21.733) ; v1(71.788,13.937) C5.1@71.788,14.692 ; C4.1@74.154,9.5 v1(75.004,9.5)
  Bottom Layer w0.152: J2.6@19.275,40.675 20.076,40.675 20.2,40.799 J2.5
  other v1: 47.209,1.24 61.125,1.28 13.801,1.397 26.714,1.564 63.615,1.687 64.669,1.81 13.801,2.278 64.669,2.47 13.801,2.941 64.922,3.228 65.559,3.246 13.047,3.843 32.81,4.191 51.166,4.361 70.26,6.73 64.922,7.887 60.075,8.092 1.004,8.722 24.981,11.587 60.091,14.784 76.474,15.037 56.047,15.71 15.989,16.009 13.88,16.059 60.617,17.422 76.474,17.963 68.282,18.538 74.289,19.385 68.359,20.256 1.283,20.508 65.359,22.213 61.907,22.325 59.858,22.403 58,22.565 48.435,27.03 53.379,27.097 43.144,27.132 71.797,33.531 64.427,33.741 0.596,36.068 65.799,39.279 56.68,40.803 38.316,40.959 59.797,43.283 9.436,43.409
  other v2: 63.813,10.637 64.913,10.637 66.013,10.637 67.113,10.637 62.713,11.737 63.813,11.737 64.913,11.737 66.013,11.737 68.213,11.737 62.713,12.837 63.813,12.837 64.913,12.837 67.113,12.837 68.213,12.837 62.713,13.937 63.813,13.937 66.013,13.937 67.113,13.937 68.213,13.937 62.713,15.037 64.913,15.037 66.013,15.037 67.113,15.037 68.213,15.037 63.813,16.137 64.913,16.137 66.013,16.137 67.113,16.137 68.213,16.137
INT: IC1.24 J4.12 R4.1 | length 29.9
  Top Layer w0.152: J4.12 42.357,7.007 42.357,7.759 43.275,8.677 43.275,9.038 43.337,9.099 43.337,10.137 43.782,10.582 53.443,10.582 53.751,10.273 53.751,8.844 54.354,8.241 55.206,8.241 56.675,9.71 56.675,14.422 56.957,14.704 57.5,14.704 57.532,14.735 58.589,14.735 59.84,15.987 IC1.24
LED_CS: IC3.12 IC4.12 IC5.12 J4.14 | length 37.2
  Top Layer w0.152: IC4.12 26,15.1 27.1,14 28.969,14 30.4,15.431 30.4,17.4 31,18 33.2,18 33.675,17.525 IC3.12 33.675,14.725 34.5,13.9 36.7,13.9 37.763,14.963 37.763,17.08 38.195,17.512 40.288,17.512 40.58,17.22 40.58,16.145 IC5.12 40.675,12.775 38.2,10.3 38.2,8.07 J4.14
LED_GREEN_CH0: IC5.15 R13.1 | length 23.5
  Top Layer w0.152: IC5.15 42.625,17.225 42.7,17.3 51.5,17.3 57.323,23.123 R13.1
LED_GREEN_CH1: IC5.1 R16.1 | length 14.1
  Top Layer w0.152: IC5.1 43.275,22.275 43.7,22.7 50.5,22.7 52.497,24.697 R16.1
LED_GREEN_CH2: IC5.2 R19.1 | length 10.2
  Top Layer w0.152: IC5.2 42.625,23.008 43.777,24.159 45.413,24.159 45.647,24.393 v1(47.2,24.393) ; v1(47.2,25.7) 47.2,28.065 R19.1
  Bottom Layer w0.152: v1(47.2,24.393) v1(47.2,25.7)
LED_GREEN_CH3: IC5.3 R22.1 | length 6.4
  Top Layer w0.152: v1(41.965,24.638) 41.975,24.628 IC5.3 ; v1(42,25.9) 42,28.072 R22.1
  Bottom Layer w0.152: v1(41.965,24.638) 41.965,25.865 v1(42,25.9)
LED_GREEN_CH4: IC5.4 R25.1 | length 8.3
  Top Layer w0.152: R25.1 37.638,27.17 38.39,26.418 v1(39.088,26.418) ; v1(40.288,24.628) 41.325,23.591 IC5.4
  Bottom Layer w0.152: v1(39.088,26.418) 39.088,25.828 v1(40.288,24.628)
LED_GREEN_CH5: IC5.5 R28.1 | length 13.3
  Top Layer w0.152: R28.1 32.177,27.323 32.9,26.6 v1(34.1,26.6) ; v1(34.675,24.714) 34.675,24.784 34.691,24.8 39.1,24.8 40.675,23.225 IC5.5
  Bottom Layer w0.152: v1(34.1,26.6) 34.675,26.025 v1(34.675,24.714)
LED_GREEN_CH6: IC5.6 R31.1 | length 16.5
  Top Layer w0.152: R31.1 27.478,27.722 v1(29.3,25.9) ; v1(32.2,24.2) 32.387,24.387 34.326,24.387 34.477,24.236 34.873,24.236 35.024,24.387 36.193,24.387 36.393,24.187 39.088,24.187 40.025,23.25 IC5.6
  Bottom Layer w0.152: v1(29.3,25.9) 30.72,24.48 31.54,24.48 31.821,24.2 v1(32.2,24.2)
LED_GREEN_CH7: IC5.7 R34.1 | length 21.2
  Top Layer w0.152: R34.1 22.8,27.88 22.8,26.9 24.525,25.175 26.491,25.175 v1(26.521,25.206) ; v1(31.3,23.9) 31.679,23.9 31.96,23.62 32.44,23.62 32.801,23.98 34.301,23.98 34.35,23.931 34.999,23.931 35.049,23.98 35.64,23.98 35.84,23.78 38.603,23.78 39.375,23.008 IC5.7
  Bottom Layer w0.152: v1(26.521,25.206) 29.294,25.206 30.6,23.9 v1(31.3,23.9)
LED_OEN: IC3.13 IC4.13 IC5.13 J4.18 | length 44
  Top Layer w0.152: IC4.13 26.65,15.15 27.4,14.4 28.8,14.4 29.762,15.362 29.762,17.362 30.806,18.406 33.368,18.406 34.325,17.45 IC3.13 34.325,14.506 34.531,14.3 36.669,14.3 37.357,14.988 37.357,17.248 38.027,17.918 40.515,17.918 41.325,17.108 IC5.13 41.325,11.025 40.7,10.4 40.7,5.9 40,5.2 35.99,5.2 J4.18
LED_RED_CH0: IC3.15 R15.1 | length 28.1
  Top Layer w0.152: IC3.15 35.625,17.302 36.902,18.579 50.779,18.579 54.275,22.075 R15.1
LED_RED_CH1: IC3.1 R18.1 | length 16.6
  Top Layer w0.152: IC3.1 38.006,21.95 v1(38.027,21.971) ; v1(45.089,24.943) 45.444,25.298 46.925,25.298 47.002,25.221 47.704,25.221 49.449,26.966 R18.1
  Bottom Layer w0.152: v1(38.027,21.971) 38.972,22.917 42.324,22.917 44.351,24.943 v1(45.089,24.943)
LED_RED_CH2: IC3.2 R21.1 | length 13.2
  Top Layer w0.152: IC3.2 35.625,22.905 35.901,23.18 38.237,23.18 v1(38.307,23.25) ; v1(44.266,26.1) 44.266,28.117 44.4,28.251 R21.1
  Bottom Layer w0.152: v1(38.307,23.25) 41.415,23.25 v1(44.266,26.1)
LED_RED_CH3: IC3.3 R24.1 | length 9.4
  Top Layer w0.152: IC3.3 35.009,21.984 35.009,23.209 35.2,23.4 v1(35.3,23.4) ; v1(38.307,27.178) 39.162,28.033 R24.1
  Bottom Layer w0.152: v1(35.3,23.4) 35.3,26.33 36.15,27.18 v1@38.307,27.18
LED_RED_CH4: IC3.4 R27.1 | length 7.4
  Top Layer w0.152: v1(33.4,27.2) 34.482,28.282 R27.1 ; IC3.4 34.325,23.267 v1(34.429,23.371)
  Bottom Layer w0.152: v1(33.4,27.2) 33.4,24.4 v1(34.429,23.371)
LED_RED_CH5: IC3.5 R30.1 | length 8.9
  Top Layer w0.152: R30.1 29.129,27.071 v1(29.4,26.8) ; IC3.5 v1(33.675,23.325)
  Bottom Layer w0.152: v1(29.4,26.8) 29.4,26.621 31.134,24.887 32.334,24.887 33.675,23.546 v1(33.675,23.325)
LED_RED_CH6: IC3.6 R33.1 | length 12.9
  Top Layer w0.152: R33.1 25.954,26.758 v1(25.954,25.654) ; v1(32.9,23.2) 33,23.2 33.025,23.175 IC3.6
  Bottom Layer w0.152: v1(25.954,25.654) 25.954,25.096 27.305,23.746 29.402,23.746 29.948,23.2 v1(32.9,23.2)
LED_RED_CH7: IC3.7 R36.1 | length 16.9
  Top Layer w0.152: R36.1 19.35,27.224 23.399,23.175 v1(23.962,23.175) ; v1(29.204,23.267) 32.012,23.267 32.375,22.904 IC3.7
  Bottom Layer w0.152: v1(23.962,23.175) 29.112,23.175 v1(29.204,23.267)
LED_SCK: IC3.11 IC4.11 IC5.11 J4.16 | length 32.9
  Top Layer w0.152: IC4.11 25.35,15.05 26.8,13.6 29,13.6 30.9,15.5 30.9,16.9 31.594,17.594 32.806,17.594 33.025,17.375 IC3.11 33.025,14.475 33.229,14.271 33.603,14.271 33.883,13.99 33.883,13.617 33.906,13.594 35.8,13.594 ; J4.16 35.8,7.93 35.8,13.594 ; IC5.11@39.93,16.699 39.93,16.912 39.737,17.105 38.363,17.105 38.17,16.912 38.17,14.27 37.494,13.594 35.8,13.594
LED_SDI: IC3.14 J4.17 | length 10.2
  Top Layer w0.152: J4.17 34.46,12.86 v1(34.7,13.1) ; IC3.14 34.975,17.475 v1(35.1,17.6)
  Bottom Layer w0.152: v1(34.7,13.1) 35.1,13.5 v1(35.1,17.6)
LED_YELLOW_CH0: IC4.15 R14.1 | length 36.1
  Top Layer w0.152: IC4.15 27.95,17.45 29.7,19.2 49.7,19.2 53.751,23.251 v1(53.751,26.3) ; v1(54.868,26.3) 55.799,27.231 R14.1
  Bottom Layer w0.152: v1(53.751,26.3) v1(54.868,26.3)
LED_YELLOW_CH1: IC4.1 R17.1 | length 27.4
  Top Layer w0.152: IC4.1 28.6,23.34 29.006,23.746 30.325,23.746 31.772,25.193 41.599,25.193 41.676,25.117 42.163,25.117 42.815,24.464 45.287,24.464 45.694,24.872 49.372,24.872 50.973,26.473 R17.1
LED_YELLOW_CH2: IC4.2 R20.1 | length 22
  Top Layer w0.152: IC4.2 27.95,23.121 28.879,24.05 30.055,24.05 31.502,25.498 41.726,25.498 41.802,25.421 44.264,25.421 45.893,27.051 R20.1
LED_YELLOW_CH3: IC4.3 R23.1 | length 17.4
  Top Layer w0.152: IC4.3 27.3,23.425 28.268,24.393 29.823,24.393 31.232,25.802 39.264,25.802 40.686,27.224 R23.1
LED_YELLOW_CH4: IC4.4 R26.1 | length 13.5
  Top Layer w0.152: IC4.4 26.65,23.35 28.099,24.799 29.655,24.799 30.977,26.121 35.011,26.121 36.114,27.224 R26.1
LED_YELLOW_CH5: IC4.5 R29.1 | length 9.3
  Top Layer w0.152: IC4.5 26,23.577 27.629,25.206 29.426,25.206 30.653,26.432 R29.1
LED_YELLOW_CH6: IC4.6 R32.1 | length 7.4
  Top Layer w0.152: IC4.6 25.35,23.358 27,25.008 27,26.143 25.954,27.189 R32.1
LED_YELLOW_CH7: IC4.7 R35.1 | length 7.9
  Top Layer w0.152: R35.1 20.874,27.026 24.7,23.2 IC4.7
NetB1_1: B1.1 C12.1 R5.1 | length 8.3
  Top Layer w0.152: B1.1 7.606,4 8.019,3.587 9.5,3.587 10.278,2.809 10.278,1.972 C12.1
NetB2_1: B2.1 C13.1 R37.1 | length 7.9
  Top Layer w0.152: C13.1 67.663,1.39 68.161,1.889 68.203,1.889 68.292,1.978 R37.1 69.622,2.464 69.738,2.579 70.997,2.579 72.418,4 B2.1
NetC4_2: C4.2 IC1.2 Q1.1 R2.1 | length 5.6
  Top Layer w0.152: IC1.2 70.877,10.787 R2.1 71.898,10.582 71.918,10.602 73.29,10.602 C4.2 ; Q1.1@73.704,10.602 Q1.1@74.154,11.052
NetC5_2: C5.2 IC1.3 Q1.2 R2.2 | length 9.5
  Top Layer w0.152: IC1.3 70.998,11.437 R2.2 71.102,11.522 72.638,13.057 73.43,13.057 73.592,13.22 73.592,14.351 Q1.2@73.74,14.498 ; C5.2 73.165,15.487 73.74,14.913 Q1.2@73.74,14.498 ; Q1.2@74.028,15.452 Q1.2@74.154,15.452 ; Q1.2 Q1.2@73.74,14.498
NetC9_2: C9.2 J1.2 R9.2 | length 5
  Top Layer w0.152: J1.2 73.29,26.14 C9.2 72.331,25 71.918,25.413 R9.2
NetC10_1: C10.1 IC1.43 | length 1.9
  Top Layer w0.152: C10.1 68.063,7.631 IC1.43
NetC28_2: C28.2 J1.5 R11.1 R12.1 | length 15.2
  Top Layer w0.152: v1(66.271,21.599) 66.271,22.253 R12.1 ; J1.5 68.167,29.993 68.893,29.993 70.26,28.626 70.26,26.423 69.538,25.7 69.538,23.492 70.006,23.024 70.006,22.999 70.405,22.6 C28.2 70.105,22.275 R11.1 69.041,22.11 v1(69.041,21.733)
  Bottom Layer w0.152: v1(66.271,21.599) 66.28,21.59 68.804,21.59 68.947,21.733 v1(69.041,21.733)
NetC62_2: C62.2 FB5.1 J4.29 | length 42.1
  Top Layer w0.152: FB5.1@18,34.6 17.4,34 16.9,34 16.9,33.05 17.379,33.05 17.379,26.027 17.178,25.827 17.178,17.891 23.174,11.895 23.364,11.895 25.556,9.703 25.556,8.484 24.972,7.899 23.6,7.899 23.067,7.366 23.067,6.223 22.229,5.385 20.984,5.385 20.527,5.842 20.527,7.963 J4.29
NetC63_2: C63.2 D4.4 FB4.1 J4.26 | length 42.6
  Top Layer w0.457: FB4.1 11.85,33.25 C63.2 ; C63.2@13.124,33.226 13.2,33.15 13.273,33.223 13.955,33.223 13.955,30.785 14.45,30.29 D4.4 12.946,28.446 12.946,27.397 14.91,25.433 14.91,5.617 15.93,4.597 22.168,4.597 J4.26
NetD4_2: D4.2 J4.28 L1.3 | length 29.4
  Top Layer w0.152: L1.3 16.129,31.55 16.98,30.699 16.98,28.58 16.35,27.95 D4.2 16.35,17.55 23.1,10.8 23.1,8.07 J4.28
NetD4_3: D4.3 J4.27 L1.2 | length 26.2
  Top Layer w0.152: L1.2 14.7,31.233 15.163,30.77 15.163,30.437 15.65,29.95 D4.3 16.35,29.75 15.7,29.1 15.7,17.4 21.76,11.34 J4.27
NetFB4_2: FB4.2 J2.1 | length 18.2
  Top Layer w0.5: FB4.2 11.6,35.5 11.709,35.391 v1(14.7,35.391)
  Bottom Layer w0.4: 22.8,39.332 J2.1
  Bottom Layer w0.5: v1(14.7,35.391) 16.075,34.015 21.15,34.015 21.166,34 21.5,34 22,34.5 22,38.532 22.8,39.332
NetFB5_2: FB5.2 J2.4 | length 6.3
  Top Layer w0.5: FB5.2@18,36.4 18.9,36.4 v1(19,36.5)
  Bottom Layer w0.5: v1(19,36.5) 19,38 20.85,39.85 J2.4
NetIC1_11: IC1.11 R10.1 | length 4.8
  Top Layer w0.152: IC1.11 70.195,16.637 71.584,18.026 72.596,18.026 72.97,18.4 R10.1@72.97,19.001
NetIC1_35: IC1.35 R3.2 | length 1.5
  Top Layer w0.152: R3.2 IC1.35
NetIC3_9: IC3.9 IC4.14 | length 8.7
  Top Layer w0.152: IC4.14 v1(27.3,17.7) ; v1(30.7,14.6) 31.6,14.6 31.725,14.725 IC3.9
  Bottom Layer w0.152: v1(27.3,17.7) 30.364,14.636 30.664,14.636 v1(30.7,14.6)
NetIC4_9: IC4.9 IC5.14 | length 23.6
  Top Layer w0.152: IC4.9 24.05,17.35 26.4,19.7 v1(37.1,19.7) ; v1(37.1,18.1) 37.223,18.223 41.377,18.223 41.975,17.625 IC5.14
  Bottom Layer w0.152: v1(37.1,18.1) v1(37.1,19.7)
NetJ2_2: J2.2 L1.1 | length 12.9
  Top Layer w0.152: L1.1 14.7,33.942 15.179,34.421 15.179,36.11 16.305,37.236 18.213,37.236 20.49,39.512 20.72,39.512 20.955,39.747 22.03,39.747 v1(22.127,39.649)
  Bottom Layer w0.152: v1(22.127,39.649) 22.127,39.772 22.15,39.794 J2.2
NetJ2_3: J2.3 L1.4 | length 11.8
  Top Layer w0.152: L1.4 15.5,36 16.432,36.932 18.34,36.932 20.616,39.208 21.431,39.208 v1(21.492,39.268)
  Bottom Layer w0.152: v1(21.492,39.268) 21.492,40.992 J2.3
NetJ4_19: J4.19 PB2.1 | length 52.5
  Top Layer w0.152: PB2.1@2.75,41.5 PB2.1 2.75,40.993 9,34.743 9,27.477 11.458,25.019 v1(14.279,25.019) ; v1@18,24.892 18.5,24.392 18.5,17 23.3,12.2 30.8,12.2 31.92,11.08 J4.19
  Bottom Layer w0.152: v1(14.279,25.019) 17.829,25.019 17.905,25.095 v1(18,25)
NetJ4_20: J4.20 PB3.1 | length 54.5
  Top Layer w0.152: PB3.1@11.75,41.5 PB3.1 11.75,37.75 10.975,36.975 10.475,36.975 9.5,36 9.5,28 11.948,25.552 v1(13.872,25.552) ; v1(17.657,25.629) 18.048,25.629 18.805,24.872 18.805,17.195 23.427,12.573 31.002,12.573 33.2,10.375 33.2,8.01 J4.20
  Bottom Layer w0.152: v1(13.872,25.552) 17.581,25.552 v1(17.657,25.629)
NetLD1_2: LD1.2 R13.2 | length 8.9
  Top Layer w0.152: LD1.2 56.4,36.993 56.4,35.4 56.9,34.9 56.9,31.4 57.323,30.977 R13.2
NetLD1_4: LD1.4 R14.2 | length 6.3
  Top Layer w0.152: LD1.4 56.38,34.473 56.38,32.08 55.799,31.499 R14.2
NetLD1_6: LD1.6 R15.2 | length 3.5
  Top Layer w0.152: R15.2 54.275,30.975 55.375,32.075 LD1.6
NetLD2_2: LD2.2 R16.2 | length 9
  Top Layer w0.152: LD2.2 51.8,36.64 51.8,35.1 51.957,34.943 51.957,31.943 52.497,31.403 R16.2
NetLD2_4: LD2.4 R17.2 | length 6.2
  Top Layer w0.152: LD2.4 51.427,34.473 51.427,31.627 50.973,31.173 R17.2
NetLD2_6: LD2.6 R18.2 | length 3.5
  Top Layer w0.152: R18.2 49.449,30.749 50.422,31.722 LD2.6
NetLD3_2: LD3.2 R19.2 | length 8.9
  Top Layer w0.152: LD3.2 46.8,36.687 46.8,34.8 46.881,34.719 46.881,31.357 47.417,30.821 R19.2
NetLD3_4: LD3.4 R20.2 | length 6.3
  Top Layer w0.152: LD3.4 45.469,34.831 46.25,34.05 46.25,33.803 46.474,33.579 46.474,32.522 45.893,31.94 R20.2
NetLD3_6: LD3.6 R21.2 | length 3.5
  Top Layer w0.152: R21.2 44.369,30.769 45.469,31.869 LD3.6
NetLD4_2: LD4.2 R22.2 | length 8.8
  Top Layer w0.152: LD4.2 41.6,36.934 41.6,34.8 42,34.4 42,30.092 R22.2
NetLD4_4: LD4.4 R23.2 | length 6.4
  Top Layer w0.152: LD4.4 40.516,34.36 41.521,33.354 41.521,32.522 40.686,31.686 R23.2
NetLD4_6: LD4.6 R24.2 | length 3.6
  Top Layer w0.152: R24.2 39.162,30.962 40.516,32.316 LD4.6
NetLD5_2: LD5.2 R25.2 | length 9
  Top Layer w0.152: LD5.2 36.9,36.681 36.9,34.7 36.975,34.625 36.975,31.725 37.638,31.062 R25.2
NetLD5_4: LD5.4 R26.2 | length 6.2
  Top Layer w0.152: LD5.4 35.563,34.937 36.568,33.932 36.568,31.768 36.114,31.314 R26.2
NetLD5_6: LD5.6 R27.2 | length 3.5
  Top Layer w0.152: R27.2 34.59,30.89 35.563,31.863 LD5.6
NetLD6_2: LD6.2 R28.2 | length 8.8